# EAGLE board MMA7455Lbreakoutboard-v1a (EAGLE 5.06)
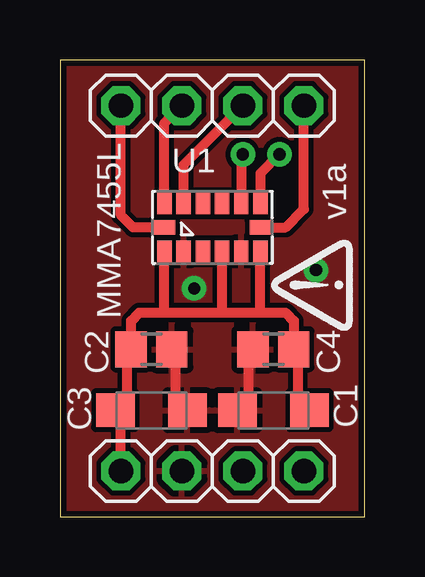
[diagram p0: board, top side]
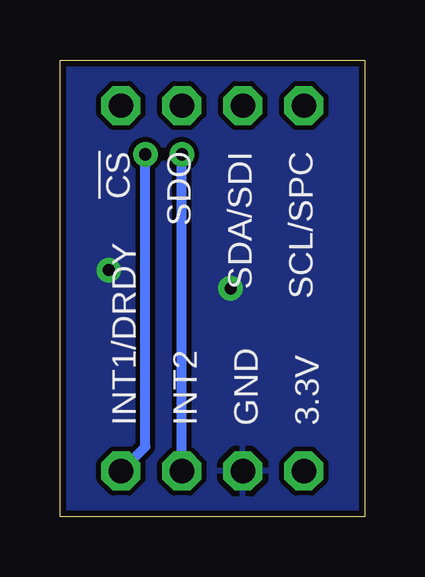
[diagram p1: board, bottom side, seen from below]

Size 12.7 x 19.05 mm. Coordinates in mm from the lower left corner, seen from the top.
Outline: 0,0 12.7,0 12.7,19.05 0,19.05 0,0
Copper layers (1*16): Top 0.035mm / dielectric 1.5mm / Bottom 0.035mm
Design rules "SparkFun- modified *": minimum track width 8mil, minimum drill 20mil, track to track 8mil, track to pad 8mil, pad to pad 6mil, via to via 8mil, smd to smd 6mil, copper to edge 10mil, drill to drill 8mil, minimum pad ring 12mil, minimum via ring 10mil, stop-mask expansion 2mil, vias tented up to drill 25mil, thermal gap 10mil

## Footprints (pad centres in the part's own frame; a part is rotated, then mirrored left to right if it is on the bottom)
SMC_A = smd 1.6 x 1.4: + -1.5,0; - 1.5,0
C805 = smd 1.3 x 1.5: 1 -0.85,0; 2 0.85,0
1X04 = drill 1.016 octagon: 1 -3.81,0; 2 -1.27,0; 3 1.27,0; 4 3.81,0
LGA-14 = smd 0.6 x 0.9: 1 -2,-1; 2 -1.2,-1; 3 -0.4,-1; 4 0.4,-1; 5 1.2,-1; 6 2,-1; 8 2,1; 9 1.2,1; 10 0.4,1; 11 -0.4,1; 12 -1.2,1; 13 -2,1 | smd 0.9 x 0.6: 7 2,0; 14 -2,0

## Placement (x,y rotation side)
C1  10uF  [SMC_A]  8.89,4.45 180 top
C2  0.1uF  [C805]  3.81,6.99 0 top
C3  10uF  [SMC_A]  3.81,4.45 0 top
C4  0.1uF  [C805]  8.89,6.99 180 top
JP1  [1X04]  6.35,1.91 0 top
JP2  [1X04]  6.35,17.14 0 top
U1  MMA7455L  [LGA-14]  6.35,12.06 0 top
U$1  [DP_LOGO]  11.56,9.65 90 top

## Library data of the parts
C1-C4 U$1 = dp_devices
JP1 JP2 = pinhead - Copy
U1 = jer_eagle

## Nets
!CS: JP2.4 U1.7
+3V3: C1.+ C2.1 C3.+ C4.1 JP1.1 U1.1 U1.4 U1.6
GND: C1.- C2.2 C3.- C4.2 JP1.2 U1.2 U1.5
INT1/DRDY: JP1.4 U1.8
INT2: JP1.3 U1.9
SCL/SPC: JP2.1 U1.14
SDA/SDI/SDO: JP2.2 U1.13
SDO: JP2.3 U1.12

## Tracks (layer width: path | path; a pad name or v marks a point on that pad's centre or on a via)
!CS
  Top 0.406: U1.7 9.4,12.06 10.16,12.83 JP2.4
+3V3
  Top 0.406: C1.+ 9.91,4.93 9.91,6.99 C4.1 9.74,8.17 9.4,8.51 8.38,8.51 | JP1.1 2.54,4.21 C3.+ 2.79,4.93 2.79,6.99 C2.1 2.96,8.17 3.3,8.51 4.32,8.51 | 4.32,8.51 6.86,8.51 | 6.86,8.51 8.38,8.51 | U1.6 8.35,8.54 8.38,8.51 | U1.4 6.75,8.62 6.86,8.51 | U1.1 4.35,8.54 4.32,8.51
GND  (via drill 0.51)
  Top 0.406: C2.2 4.66,6.9 4.83,6.73 4.83,4.93 C3.- | C4.2 8.04,6.9 7.87,6.73 7.87,4.93 C1.-
  other vias: 5.59,9.53 10.67,10.29
  pour Bottom: 0,0 12.7,0 12.7,19.05 0,19.05
  pour Top: 0,0 12.7,0 12.7,19.05 0,19.05
INT1/DRDY  (via drill 0.51)
  Top 0.406: U1.8 8.35,14.32 v9.14,15.11
  Bottom 0.406: v9.14,15.11 9.14,2.92 JP1.4
INT2  (via drill 0.51)
  Top 0.406: U1.9 7.55,15.04 v7.62,15.11
  Bottom 0.406: JP1.3 v7.62,15.11
SCL/SPC
  Top 0.406: U1.14 3.05,12.06 2.54,12.57 JP2.1
SDA/SDI/SDO
  Top 0.406: U1.13 4.35,16.41 JP2.2
SDO
  Top 0.406: U1.12 5.15,14.68 JP2.3

## Text on the board
tNames: v1a | MMA7455L
bNames: SCL/SPC | SDA/SDI | SDO | !CS | 3.3V | GND | INT2 | INT1/DRDY
tDocu: MMA7455L Breakout Board v1a | Dangerous Prototypes | CC-0 | 2010